# Altium PCB lined.PcbDoc (part 1 of 2)
Units mm, origin at the board's own origin, x right, y up, seen from the top; angles counter-clockwise.
Board outline 88.9 x 108.89 mm, 2 copper layers (Top Layer, Bottom Layer); 109 components, 117 nets, 494 pads, 325 vias.
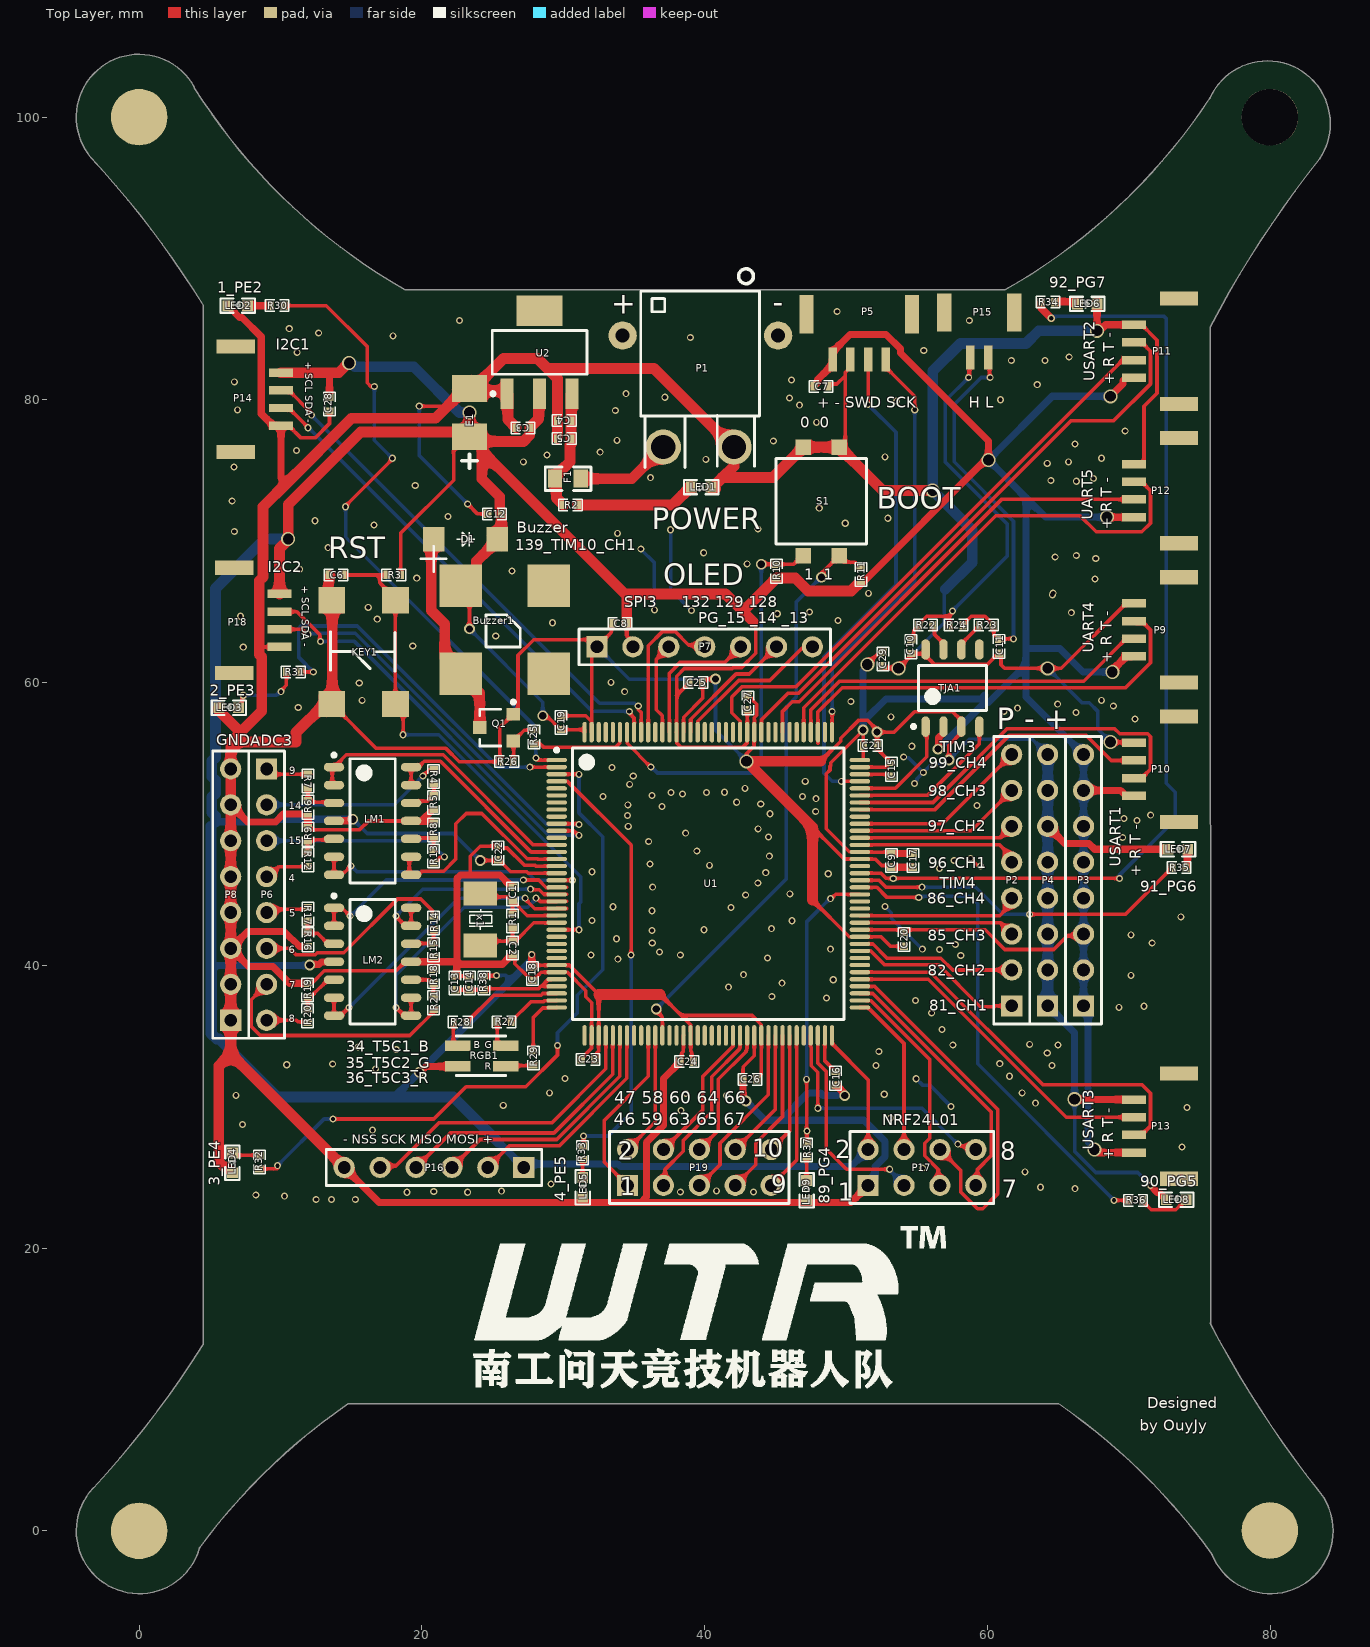
[diagram p0: Top Layer view]
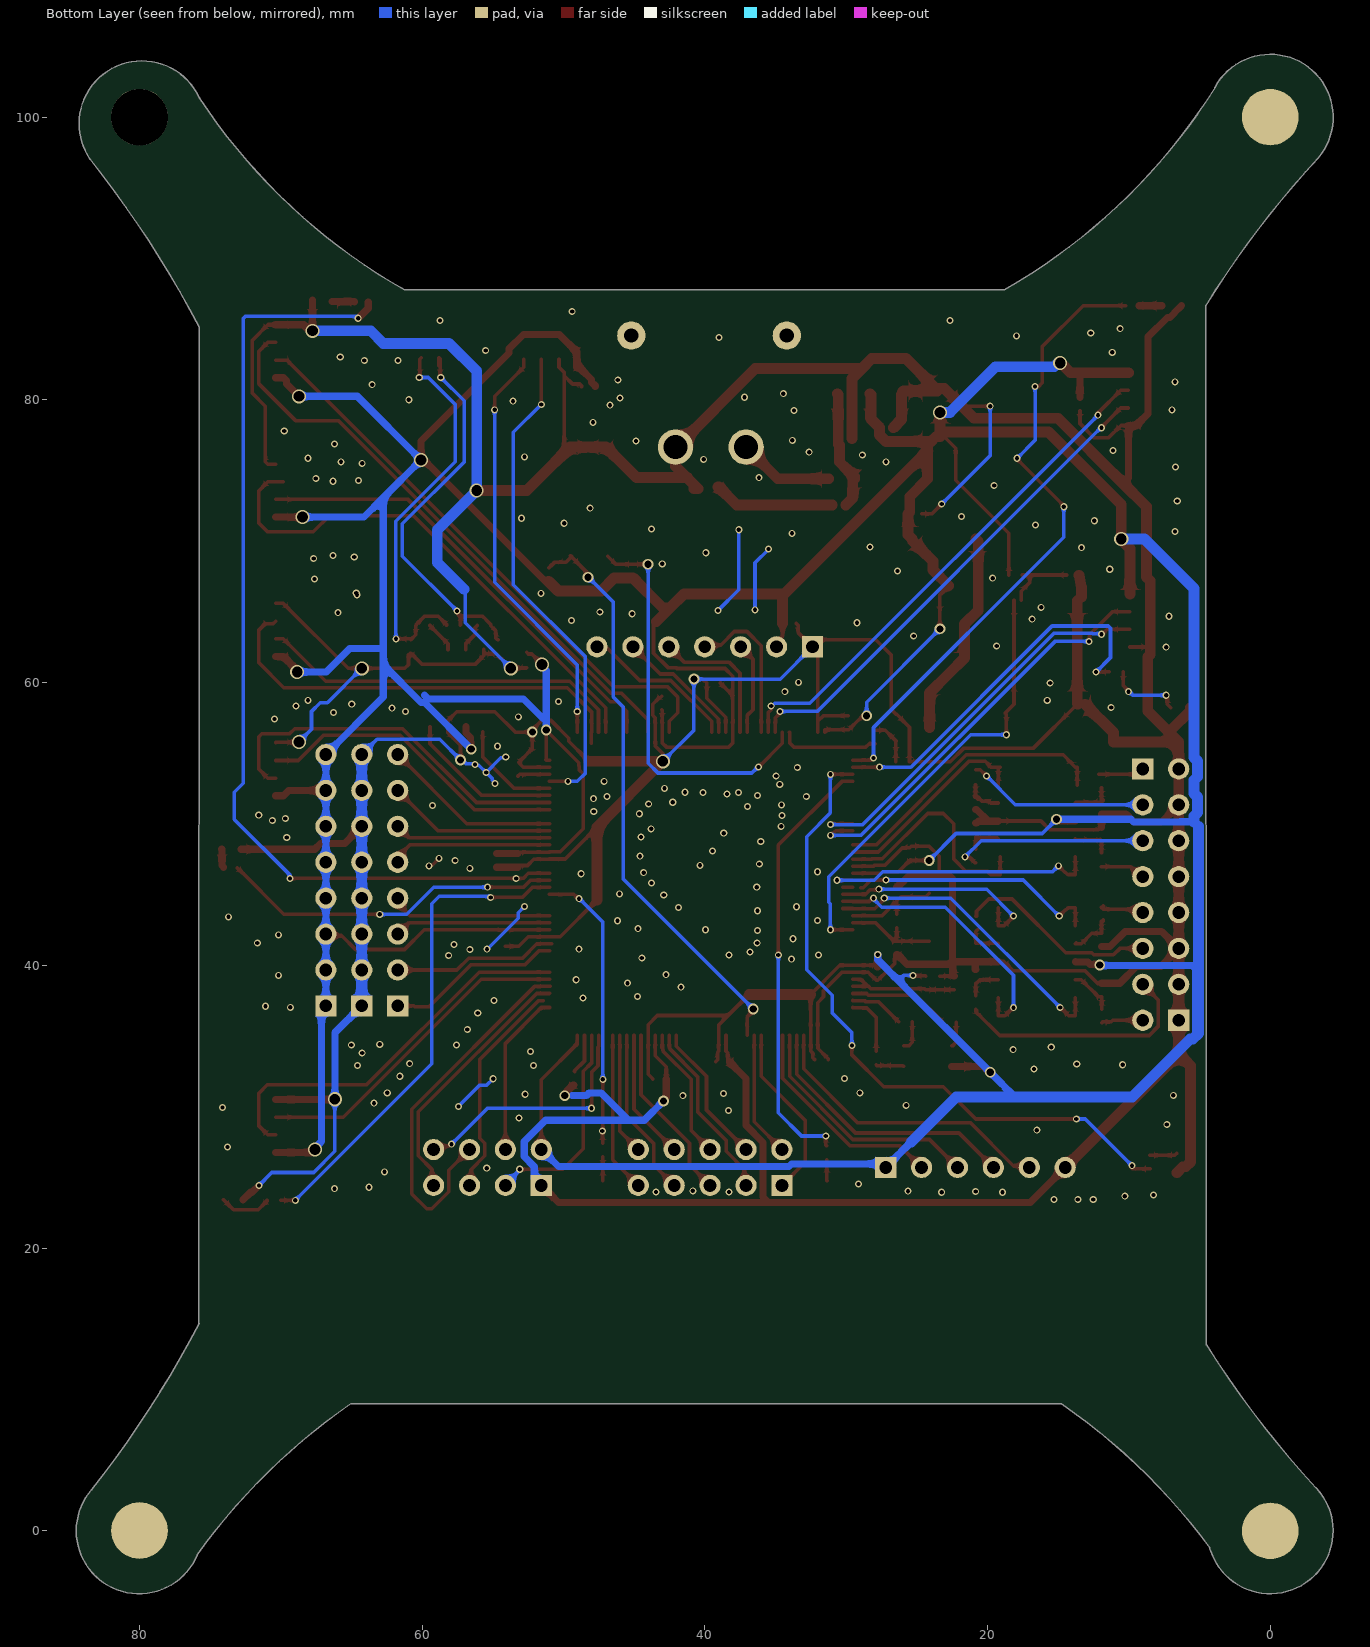
[diagram p1: Bottom Layer view, seen from below]

## Layer stack, top to bottom
Top Solder: solder mask 0.0102, Solder Resist, Dk 3.5
Top Layer: signal copper 0.0356
Dielectric 1: dielectric 0.32, FR-4, Dk 4.8
Bottom Layer: signal copper 0.0356
Bottom Solder: solder mask 0.0102, Solder Resist, Dk 3.5

## Board outline
4.265,-1.259 ccw(c4.143,-1.223) 4.271,-1.223 ccw(c4.143,-1.223) 4.268,-1.2 cw(c39.883,-27.422) 14.767,8.981 ccw(c14.694,9.086) 14.782,8.994 ccw(c14.808,9.119) 14.808,8.991 64.955,8.991 ccw(c64.955,9.119) 65.017,9.007 cw(c39.726,-27.635) 75.874,-1.643 ccw(c75.977,-1.568) 75.89,-1.661 ccw(c76.017,-1.647) 75.899,-1.696 ccw(c80.01,0) 84.457,0 ccw(c80.01,0) 83.369,2.915 ccw(c83.273,2.831) 83.364,2.92 ccw(c83.261,2.845) 83.361,2.924 cw(c143.122,49.915) 75.761,14.672 ccw(c75.667,14.757) 75.794,14.757 ccw(c75.667,14.757) 75.794,14.757 75.752,85.154 cw(c142.998,49.823) 83.487,97.031 ccw(c83.387,97.111) 83.507,97.068 ccw(c83.414,97.155) 83.52,97.085 ccw(c79.81,99.537) 84.257,99.537 ccw(c79.81,99.537) 75.749,101.351 ccw(c75.819,101.244) 75.713,101.315 cw(c40.256,124.726) 61.24,87.781 ccw(c61.216,87.655) 61.216,87.783 18.818,87.783 ccw(c18.741,87.681) 18.805,87.792 cw(c39.911,124.722) 3.909,102.068 ccw(c3.783,102.085) 3.91,102.085 ccw(c3.783,102.085) 3.895,102.147 ccw(c0,100) -3.388,97.119 ccw(c-3.277,97.18) -3.37,97.094 cw(c-54.077,50.294) 4.551,86.684 4.521,13.208 ccw(c4.648,13.208) 4.525,13.174 ccw(c4.601,13.072) 4.493,13.14 cw(c-54.077,49.936) -3.23,3.043 ccw(c-3.177,2.927) -3.271,3.013 ccw(c0,0)

## Design rules (kind name [scope] priority, off if disabled: settings)
Clearance [All] p1: gap=0.203 ignorepadtopadclearanceinfootprint=TRUE except(0: Arc-Hole Track-Hole SMDPad-Hole THPad-Hole Via-Hole Fill-Hole Poly-Hole Region-Hole Text-Hole)
ComponentClearance [All] p1: gap=0 collisioncheckmode=3 verticalgap=0 showdistances=FALSE
MinimumSolderMaskSliver [All] p1: minsoldermaskwidth=0
PolygonConnect [All] p1: connectstyle=Direct reliefconductorwidth=0.254 reliefentries=4 polygonreliefangle="90 Angle" airgapwidth=0.254
RoutingVias [All] p1: holewidth=0.3 width=0.5 viastyle="Through Hole" minholewidth=0.3 minwidth=0.5 maxholewidth=0.3 maxwidth=0.5
SilkToSilkClearance [All] p1: silktosilkclearance=0
SilkToSolderMaskClearance [IsPad] p1: minsilkscreentomaskgap=0 clearancetoexposedcopper=TRUE
SolderMaskExpansion [All] p1: expansion=0.102
Width [All] p1: maxlimit=1.27 minlimit=0.203 preferedwidth=0.203
26 further rules are at their usual default settings.

## Components (designator, comment, footprint, x,y, rotation, side; value= is the part's Value field where it differs from the comment)
Buzzer1 "Buzzer" BUZZER 30.107,67.996 r180 top
C1 "22PF" 0402 26.416,45.047 r90 top
C2 "22PF" 0402 26.416,41.237 r270 top
C3 "0.1uf" 0402 27.153,78.029 r180 top
C4 "0.1uf" 0402 30.074,78.537 r180 top
C5 "10uf" 0402 30.074,77.267 r180 top
C6 "1uf" 0402 13.919,67.615 r180 top
C7 "0.1uf" 0402 48.235,80.95 r180 top
C8 "0.1uf" 0402 34.011,64.186 r0 top
C9 "0.1uf" 0402 53.213,47.422 r270 top
C10 "30pf" 0402 54.61,62.545 r90 top
C11 "30pf" 0402 60.833,62.565 r90 top
C12 "10uf" 0402 25.146,71.934 r0 top
C13 "10uf" 0402 22.352,38.76 r270 top
C14 "104" 0402 23.368,38.76 r270 top
C15 "225" 0402 53.213,53.873 r270 top
C16 "225" 0402 49.27,32.011 r90 top
C17 "106" 0402 54.737,47.422 r90 top
C18 "104" 0402 27.813,39.421 r90 top
C19 "104" 0402 29.845,57.175 r270 top
C20 "104" 0402 54.102,41.834 r90 top
C21 "104" 0402 51.714,55.55 r180 top
C22 "104" 0402 25.4,47.953 r270 top
C23 "104" 0402 31.75,33.343 r0 top
C24 "104" 0402 38.735,33.198 r0 top
C25 "104" 0402 39.37,60.001 r180 top
C26 "104" 0402 43.205,31.943 r0 top
C27 "104" 0402 43.053,58.563 r270 top
C28 "104" 0402 13.462,79.705 r90 top
C29 "104" 0402 52.601,61.671 r90 top
D1 "DIODE" DIODE 25.328,70.155 r180 top
E1 "100uF/10V" 3528 23.368,77.394 r90 top
F1 "Fuse" 0805 30.324,74.426 r0 top
KEY1 "Key" 6*6*5轻触开关 15.875,62.154 r90 top
LED1 "green" 0603 39.751,73.838 r0 top
LED2 "red" 0603 6.985,86.665 r180 top
LED3 "red" 0603 6.35,58.217 r180 top
LED4 "red" 0603 6.604,26.035 r270 top
LED5 "red" 0603 31.386,24.308 r270 top
LED6 "green" 0603 67.056,86.792 r0 top
LED7 "green" 0603 73.482,48.211 r180 top
LED8 "green" 0603 73.355,23.419 r180 top
LED9 "green" 0603 47.212,24.091 r270 top
LM1 "LM324" LM324 16.51,50.216 r0 top
LM2 "LM324" LM324 16.51,40.254 r0 top
P1 "Header 2" XT30-PW-M 39.573,81.661 r0 top locked
P2 "Header 8" HDR1X8 61.722,37.135 r90 top
P3 "Header 8" HDR1X8 66.802,37.135 r90 top
P4 "Header 8" HDR1X8 64.262,37.135 r90 top
P5 "Header 4" GH1.25_4P 50.937,84.88 r180 top
P6 "Header 8" HDR1X8 9.017,53.899 r270 top
P7 "Header 7" HDR1X7 32.385,62.535 r0 top
P8 "Header 8" HDR1X8 6.477,36.119 r90 top
P9 "Header 4" GH1.25_4P 72.383,63.726 r90 top
P10 "Header 4" GH1.25_4P 72.383,53.869 r90 top
P11 "Header 4" GH1.25_4P 72.383,83.44 r90 top
P12 "Header 4" GH1.25_4P 72.383,73.583 r90 top
P13 "Header 4" GH1.25_4P 72.383,28.636 r90 top
P14 "Header 4" GH1.25_4P 8.008,80.051 r270 top
P15 "Header 2" GH1.25_2P 61.901,89.027 r180 top
P16 "Header 6" HDR1X6 27.203,25.705 r180 top
P17 "Header 4X2" HDR2X4 51.562,24.435 r0 top
P18 "Header 4" GH1.25_4P 7.906,64.398 r270 top
P19 "Header 5X2" HDR2X5 34.544,24.435 r0 top
Q1 "S8050" SOT-23R 25.4,56.82 r90 top
R1 "1M" 0402 26.419,43.142 r90 top
R2 "560R" 0402 30.505,72.568 r0 top
R3 "10K" 0402 18.009,67.615 r0 top
R4 "100K" 0402 20.828,53.365 r270 top
R5 "100K" 0402 20.828,51.513 r90 top
R6 "100K" 0402 11.937,51.181 r90 top
R7 "100K" 0402 11.937,53.035 r90 top
R8 "100K" 0402 20.828,49.578 r270 top
R9 "100K" 0402 11.937,49.276 r270 top
R10 "10K" 0402 45.08,67.885 r270 top
R11 "10K" 0402 51.049,67.657 r90 top
R12 "100K" 0402 11.937,47.47 r270 top
R13 "100K" 0402 20.828,47.728 r270 top
R14 "100K" 0402 20.828,43.002 r270 top
R15 "100K" 0402 20.828,41.101 r90 top
R16 "100K" 0402 11.937,41.808 r90 top
R17 "100K" 0402 11.937,43.617 r90 top
R18 "100K" 0402 20.828,39.222 r270 top
R19 "100K" 0402 11.919,38.256 r270 top
R20 "100K" 0402 11.919,36.432 r270 top
R21 "100K" 0402 20.828,37.363 r270 top
R22 "0R" 0402 55.626,64.064 r180 top
R23 "0R" 0402 59.919,64.064 r0 top
R24 "120R" 0402 57.785,64.064 r180 top
R25 "510R" 0402 27.94,56.159 r90 top
R26 "10K" 0402 26.002,54.407 r0 top
R27 "47R" 0402 25.811,36.006 r180 top
R28 "47R" 0402 22.708,35.992 r0 top
R29 "68R" 0402 27.879,33.452 r270 top
R30 "1K" 0402 9.754,86.665 r0 top
R31 "1K" 0402 10.897,60.757 r0 top
R32 "1K" 0402 8.509,26.086 r270 top
R33 "1K" 0402 31.369,26.746 r90 top
R34 "510R" 0402 64.287,86.919 r180 top
R35 "510R" 0402 73.558,46.914 r180 top
R36 "510R" 0402 70.485,23.381 r180 top
R37 "510R" 0402 47.21,26.94 r90 top
R38 "10R" 0402 24.384,38.76 r270 top
RGB1 "RGB" RGB_LED 24.235,33.579 r0 top
S1 "Switch" SWITCH_2P 48.255,72.825 r0 top
TJA1 "TJA1050" TJA1050 57.531,59.619 r90 top
U1 "STM32F407ZGT6" STM32F103ZETx 40.259,45.771 r0 top
U2 "AMS1117-3.3" ASM1117 28.321,83.363 r90 top
x1 "8MHz" 8M晶振 24.13,43.244 r270 top

## Footprints (in the part's own frame and the unit in brackets; to place one, negate y for a bottom-side part, rotate by r counter-clockwise, add the part's x,y. Pads: shape width x height; smd on the part's side, far side on the other; paste and mask are expansions set on the pad)
6*6*5轻触开关 [mm]
  rect 1.85x1.9 smd: 1(-3.675,2.25) 2(3.675,2.25) 3(-3.675,-2.25) 4(3.675,-2.25)
  silkscreen extent -1.35,-2.22 1.45,2.35
8M晶振 [mm]
  rect 1.7x2.4 smd: 1(-1.85,0) 2(1.85,0)
  silkscreen extent -0.72,-0.77 0.72,0.87, body extent -2.5,-1.6 2.5,1.6, height 0.25
0402 [mil]
  rect 20x23.62 smd: 1(-19,0) 2(19,0)
  silkscreen extent -33,-16 33,16
0603 [mil]
  rect 30x30 smd: 1(-27,0) 2(27.5,-0.06)
  silkscreen extent -48,-20 48,20
0805 [mm]
  rect 1x1.27 smd: 1(-0.914,0) 2(0.914,0)
  silkscreen extent -1.6,-0.84 1.63,0.84
3528 [mm]
  rect 1.9x2.5 smd: 1(0,0) 2(3.42,0)
  silkscreen extent -2.24,-0.56 -1.24,0.56
ASM1117 [mm] "SOT223, 4-Leads, Body 6.51x7.00mm (avg), Pitch 2.30mm, IPC Medium Density"
  rect 2.15x0.9 smd: 1(-2.93,2.3) 2(-2.93,0) 3(-2.93,-2.3)
  rect 2.15x3.25 smd: 4(2.93,0)
  silkscreen extent -3.05,-3.35 1.55,3.42, body extent -1.86,-3.35 1.86,3.35, height 1.8
BUZZER [mm]
  rect 3x3 smd: 1(7.366,1.143) 2(7.366,7.366) 3(1.143,7.366) 4(1.143,1.143)
  silkscreen extent 3.15,-1.65 10.16,5.48
DIODE [mm] "SODFL, 2-Leads, Body 3.63x5.35mm, IPC Medium Density"
  rect 1.52x1.724 smd: 1(0,0) 2(4.5,0)
  silkscreen extent 1.57,-0.5 2.86,0.52
GH1.25_2P [mm]
  rect 1x2.7 smd: 0(0,2.845) 0(4.95,2.845)
  rect 0.6x1.7 smd: 1(1.85,6.045) 2(3.1,6.045)
GH1.25_4P [mm]
  rect 1x2.7 smd: 0(-3.725,-1.175) 0(3.725,-1.175)
  rect 0.6x1.7 smd: 1(-1.875,2.025) 2(-0.625,2.025) 3(0.625,2.025) 4(1.875,2.025)
HDR1X6 [mm] "Connector; Header; 6 Position"
  rect 1.5x1.5 hole 0.9: 1(0,0)
  round 1.5 hole 0.9: 2(2.54,0) 3(5.08,0) 4(7.62,0) 5(10.16,0) 6(12.7,0)
  silkscreen extent -1.27,-1.27 13.97,1.27
HDR1X7 [mm] "Connector; Header; 7 Position"
  rect 1.5x1.5 hole 0.9: 1(0,0)
  round 1.5 hole 0.9: 2(2.54,0) 3(5.08,0) 4(7.62,0) 5(10.16,0) 6(12.7,0) 7(15.24,0)
  silkscreen extent -1.27,-1.27 16.51,1.27
HDR1X8 [mm] "Connector; Header; 8 Position"
  rect 1.5x1.5 hole 0.9: 1(0,0)
  round 1.5 hole 0.9: 2(2.54,0) 3(5.08,0) 4(7.62,0) 5(10.16,0) 6(12.7,0) 7(15.24,0) 8(17.78,0)
  silkscreen extent -1.27,-1.27 19.05,1.27
HDR2X4 [mm] "Connector; Header; 4x2 Position"
  rect 1.5x1.5 hole 0.9: 1(0,0)
  round 1.5 hole 0.9: 2(0,2.54) 3(2.54,0) 4(2.54,2.54) 5(5.08,0) 6(5.08,2.54) 7(7.62,0) 8(7.62,2.54)
  silkscreen extent -1.27,-1.27 8.89,3.81
HDR2X5 [mm] "Connector; Header; 5x2 Position"
  rect 1.5x1.5 hole 0.9: 1(0,0)
  round 1.5 hole 0.9: 2(0,2.54) 3(2.54,0) 4(2.54,2.54) 5(5.08,0) 6(5.08,2.54) 7(7.62,0) 8(7.62,2.54) 9(10.16,0) 10(10.16,2.54)
  silkscreen extent -1.27,-1.27 11.43,3.81
LM324 [mm] "SOIC, 14-Leads, Body 8.65x3.90mm, Pitch 1.27mm, IPC Medium Density"
  oval 1.45x0.6 smd: 1(-2.725,3.81) 2(-2.725,2.54) 3(-2.725,1.27) 4(-2.725,0) 5(-2.725,-1.27) 6(-2.725,-2.54) 7(-2.725,-3.81) 8(2.725,-3.81) 9(2.725,-2.54) 10(2.725,-1.27) 11(2.725,0) 12(2.725,1.27) 13(2.725,2.54) 14(2.725,3.81)
  silkscreen extent -2.85,-4.4 1.6,4.78, body extent -2,-4.4 2,4.4, height 1.75
RGB_LED [mm]
  rect 1.8x0.75 smd: 1(-1.7,-0.725) 2(-1.7,0.725) 3(1.7,-0.725) 4(1.7,0.725)
  silkscreen extent -1.8,-1.36 1.7,1.44
SOT-23R [mm] "SOT-23; 3 Leads; Body 3.0 x 2.5 mm, inc. leads (LxW max)"
  rect 0.9x0.95 smd: 1(0.95,-1.048) 2(-0.95,-1.048) 3(0,1.302)
  silkscreen extent -1.3,-1.19 1.93,1.3
STM32F103ZETx [mm] "TSQFP, 144-Leads, Body 20.00x20.00mm, Pitch 0.50mm, IPC Medium Density"
  oval 1.45x0.3 smd: 1(-10.725,8.75) 2(-10.725,8.25) 3(-10.725,7.75) 4(-10.725,7.25) 5(-10.725,6.75) 6(-10.725,6.25) 7(-10.725,5.75) 8(-10.725,5.25) 9(-10.725,4.75) 10(-10.725,4.25) 11(-10.725,3.75) 12(-10.725,3.25) 13(-10.725,2.75) 14(-10.725,2.25) 15(-10.725,1.75) 16(-10.725,1.25) 17(-10.725,0.75) 18(-10.725,0.25) 19(-10.725,-0.25) 20(-10.725,-0.75) 21(-10.725,-1.25) 22(-10.725,-1.75) 23(-10.725,-2.25) 24(-10.725,-2.75) 25(-10.725,-3.25) 26(-10.725,-3.75) 27(-10.725,-4.25) 28(-10.725,-4.75) 29(-10.725,-5.25) 30(-10.725,-5.75) 31(-10.725,-6.25) 32(-10.725,-6.75) 33(-10.725,-7.25) 34(-10.725,-7.75) 35(-10.725,-8.25) 36(-10.725,-8.75) 73(10.725,-8.75) 74(10.725,-8.25) 75(10.725,-7.75) 76(10.725,-7.25) 77(10.725,-6.75) 78(10.725,-6.25) 79(10.725,-5.75) 80(10.725,-5.25) 81(10.725,-4.75) 82(10.725,-4.25) 83(10.725,-3.75) 84(10.725,-3.25) 85(10.725,-2.75) 86(10.725,-2.25) 87(10.725,-1.75) 88(10.725,-1.25) 89(10.725,-0.75) 90(10.725,-0.25) 91(10.725,0.25) 92(10.725,0.75) 93(10.725,1.25) 94(10.725,1.75) 95(10.725,2.25) 96(10.725,2.75) 97(10.725,3.25) 98(10.725,3.75) 99(10.725,4.25) 100(10.725,4.75) 101(10.725,5.25) 102(10.725,5.75) 103(10.725,6.25) 104(10.725,6.75) 105(10.725,7.25) 106(10.725,7.75) 107(10.725,8.25) 108(10.725,8.75)
  oval 0.3x1.45 smd: 37(-8.75,-10.725) 38(-8.25,-10.725) 39(-7.75,-10.725) 40(-7.25,-10.725) 41(-6.75,-10.725) 42(-6.25,-10.725) 43(-5.75,-10.725) 44(-5.25,-10.725) 45(-4.75,-10.725) 46(-4.25,-10.725) 47(-3.75,-10.725) 48(-3.25,-10.725) 49(-2.75,-10.725) 50(-2.25,-10.725) 51(-1.75,-10.725) 52(-1.25,-10.725) 53(-0.75,-10.725) 54(-0.25,-10.725) 55(0.25,-10.725) 56(0.75,-10.725) 57(1.25,-10.725) 58(1.75,-10.725) 59(2.25,-10.725) 60(2.75,-10.725) 61(3.25,-10.725) 62(3.75,-10.725) 63(4.25,-10.725) 64(4.75,-10.725) 65(5.25,-10.725) 66(5.75,-10.725) 67(6.25,-10.725) 68(6.75,-10.725) 69(7.25,-10.725) 70(7.75,-10.725) 71(8.25,-10.725) 72(8.75,-10.725) 109(8.75,10.725) 110(8.25,10.725) 111(7.75,10.725) 112(7.25,10.725) 113(6.75,10.725) 114(6.25,10.725) 115(5.75,10.725) 116(5.25,10.725) 117(4.75,10.725) 118(4.25,10.725) 119(3.75,10.725) 120(3.25,10.725) 121(2.75,10.725) 122(2.25,10.725) 123(1.75,10.725) 124(1.25,10.725) 125(0.75,10.725) 126(0.25,10.725) 127(-0.25,10.725) 128(-0.75,10.725) 129(-1.25,10.725) 130(-1.75,10.725) 131(-2.25,10.725) 132(-2.75,10.725) 133(-3.25,10.725) 134(-3.75,10.725) 135(-4.25,10.725) 136(-4.75,10.725) 137(-5.25,10.725) 138(-5.75,10.725) 139(-6.25,10.725) 140(-6.75,10.725) 141(-7.25,10.725) 142(-7.75,10.725) 143(-8.25,10.725) 144(-8.75,10.725)
  silkscreen extent -10.85,-9.6 9.6,9.6, body extent -10,-10 10,10, height 1.6
SWITCH_2P [mm]
  rect 1.1x1.1 smd: 1(-1.27,3.835) 2(-1.27,-3.835) 3(1.27,3.835) 4(1.27,-3.835)
  silkscreen extent -3.2,-3.03 3.2,3.03
TJA1050 [mm] "SOIC, 8-Leads, Body 4.90x3.90mm, Pitch 1.27mm, IPC Medium Density"
  oval 1.45x0.6 smd: 1(-2.725,1.905) 2(-2.725,0.635) 3(-2.725,-0.635) 4(-2.725,-1.905) 5(2.725,-1.905) 6(2.725,-0.635) 7(2.725,0.635) 8(2.725,1.905)
  silkscreen extent -2.85,-2.4 1.6,2.88, body extent -2,-2.4 2,2.4, height 1.75
XT30-PW-M [mm]
  round 2 hole 1: 0(-5.375,2.892) 0(5.625,2.892)
  round 2.5 hole 1.7: 1(-2.5,-5) 2(2.5,-5)
  silkscreen extent -4.09,-6.45 4.32,7.61

## Part data
C1 C2 C3 C4 C5 C6 C7 C8 C9 C10 C11 C12 C13 C14 C15 C16 C17 C18 C19 C20 C21 C22 C23 C24 C25 C26 C27 C28 C29: library part C
E1: library part C-CM, "钽电容"
LED1 LED2 LED3 LED4 LED5 LED6 LED7 LED8 LED9: library part LED
P1 P15: "Header, 2-Pin", LatestRevisionDate=17-Jul-2002, LatestRevisionNote="Re-released for DXP Platform.", Publisher="Altium Limited"
P2 P3 P4 P6 P8: "Header, 8-Pin", LatestRevisionDate=17-Jul-2002, LatestRevisionNote="Re-released for DXP Platform.", Publisher="Altium Limited"
P5 P9 P10 P11 P12 P13 P14 P18: "Header, 4-Pin", LatestRevisionDate=17-Jul-2002, LatestRevisionNote="Re-released for DXP Platform.", Publisher="Altium Limited"
P7: "Header, 7-Pin", LatestRevisionDate=17-Jul-2002, LatestRevisionNote="Re-released for DXP Platform.", Publisher="Altium Limited"
P16: "Header, 6-Pin", LatestRevisionDate=17-Jul-2002, LatestRevisionNote="Re-released for DXP Platform.", Publisher="Altium Limited"
P17: "Header, 4-Pin, Dual row", LatestRevisionDate=17-Jul-2002, LatestRevisionNote="Re-released for DXP Platform.", Publisher="Altium Limited"
P19: "Header, 5-Pin, Dual row", LatestRevisionDate=17-Jul-2002, LatestRevisionNote="Re-released for DXP Platform.", Publisher="Altium Limited"
Q1: library part NPN, "8050/BCW846/BCW847"
R1 R2 R3 R4 R5 R6 R7 R8 R9 R10 R11 R12 R13 R14 R15 R16 R17 R18 R19 R20 R21 R22 R23 R24 R25 R26 R27 R28 R29 R30 R31 R32 R33 R34 R35 R36 R37 R38: library part R
x1: library part XTAL_8MHz

## Free pads (board coordinates)
  round 4 all layers, no hole: 2(0,0) 2(0,100) 2(79.985,0.025)
  round 4 hole 4: 2(79.985,100)

## Via types
v1: diameter 0.5, hole 0.3, Top Layer to Bottom Layer, tented both sides, 293 vias
v2: diameter 0.991, hole 0.762, Top Layer to Bottom Layer, tented both sides, 16 vias
v3: diameter 0.762, hole 0.508, Top Layer to Bottom Layer, tented both sides, 16 vias

## Nets (pads, with @x,y where several pads share a name; then routed paths per layer and width w, separated by ;. In a path a pad name is that pad's centre, name@x,y a point inside that pad or via, vN(x,y) a via of type N, cw(c..) or ccw(c..) an arc to the next point about the centre after c; other vN are vias at no path point)
ADC3_4: LM1.6 LM1.7 U1.18 | length 20.3
  Top Layer w0.254: LM1.6@13.785,47.676 LM1.7@13.785,46.435 ; LM1.7@14.181,46.435 LM1.7@13.785,46.435 ; v1(14.986,47.041) 14.54,46.595 14.492,46.595 14.304,46.406 LM1.7@13.785,46.406 LM1.7@13.785,46.435 ; U1.18@29.534,46.021 29.536,46.023 v1(30.656,46.023)
  Bottom Layer w0.254: v1(14.986,47.041) 15.405,46.622 27.418,46.622 28.017,46.023 v1(30.656,46.023)
ADC3_5: LM2.1 LM2.2 U1.19 | length 18.7
  Top Layer w0.254: LM2.2@13.785,42.794 LM2.1@13.785,44.064 14.304,44.064 14.437,43.931 14.48,43.931 v1(14.926,43.485) ; v1(27.178,46.042) 28.255,46.042 28.796,45.501 U1.19@28.947,45.501 ; U1.19@29.534,45.521 29.534,45.525 U1.19@30.226,45.525
  Bottom Layer w0.254: v1(14.926,43.485) 17.483,46.042 v1(27.178,46.042)
ADC3_6: LM2.13 LM2.14 U1.20 | length 15.6
  Top Layer w0.254: v1(18.161,43.485) 18.161,43.464 18.831,42.794 LM2.13@19.235,42.794 LM2.14@19.235,44.064 ; v1(27.686,45.39) 27.733,45.343 28.308,45.343 28.621,45.03 29.525,45.03 U1.20@29.534,45.021 ; U1.20@29.534,45.025 U1.20@30.226,45.025
  Bottom Layer w0.254: v1(18.161,43.485) 20.066,45.39 v1(27.686,45.39)
ADC3_7: LM2.8 LM2.9 U1.21 | length 19.3
  Top Layer w0.254: v1(18.161,37.008) 18.204,37.008 18.767,36.444 LM2.8@19.235,36.444 LM2.9@19.235,37.714 ; v1(28.067,44.755) 28.134,44.755 28.368,44.521 U1.21@29.534,44.521 U1.21@29.525,44.53 ; U1.21@29.534,44.525 U1.21@30.226,44.525
  Bottom Layer w0.254: v1(18.161,37.008) 18.161,39.294 22.987,44.12 27.491,44.12 28.067,44.696 v1(28.067,44.755)
ADC3_8: LM2.6 LM2.7 U1.22 | length 21.5
  Top Layer w0.254: LM2.6@13.785,37.714 LM2.7@13.785,36.444 14.246,36.444 14.823,37.021 v1(14.859,37.021) ; v1(27.305,44.755) 27.305,44.688 27.981,44.012 29.525,44.012 U1.22@29.534,44.021 29.534,44.025 U1.22@30.226,44.025
  Bottom Layer w0.254: v1(14.859,37.021) 22.593,44.755 v1(27.305,44.755)
ADC3_9: LM1.1 LM1.2 U1.13 | length 20.9
  Top Layer w0.254: LM1.2@13.658,52.756 13.658,54.026 LM1.1@13.785,54.026 14.649,54.889 21.51,54.889 27.879,48.521 U1.13@29.534,48.521 29.525,48.53 28.732,48.53
ADC3_14: LM1.13 LM1.14 U1.14 | length 14.6
  Top Layer w0.254: LM1.13@19.235,52.756 19.235,53.899 19.108,54.026 LM1.14@19.235,54.026 19.754,54.026 20.16,54.432 21.311,54.432 27.722,48.021 U1.14@29.534,48.021
ADC3_15: LM1.8 LM1.9 U1.15 | length 16.3
  Top Layer w0.254: LM1.9@19.108,47.676 19.108,46.406 LM1.8@19.235,46.406 19.754,46.406 20.008,46.66 21.539,46.66 22.4,47.521 22.4,50.01 23.136,50.746 24.235,50.746 27.445,47.536 28.188,47.536 28.203,47.521 U1.15@29.534,47.521
ADC_CH1: P6.1 R7.2 | length 3.3
  Top Layer w0.254: P6.1@9.017,53.899 9.398,53.518 R7.2@11.937,53.518 R7.2@12.141,53.518
ADC_CH2: P6.2 R4.1 | length 12.9
  Top Layer w0.254: v1(20.066,53.391) 20.512,53.837 20.817,53.837 R4.1@20.828,53.848 ; R4.1@20.702,53.848 R4.1@20.748,53.848
  Bottom Layer w0.254: P6.2@9.017,51.359 18.034,51.359 v1(20.066,53.391)
ADC_CH3: P6.3 R13.2 | length 14
  Top Layer w0.254: R13.2@20.828,47.246 20.874,47.246 21.257,47.629 21.543,47.629 v1(21.59,47.676)
  Bottom Layer w0.254: P6.3@9.017,48.819 20.447,48.819 v1(21.59,47.676)
ADC_CH4: P6.4 R12.2 | length 3.2
  Top Layer w0.254: P6.4@9.017,46.279 9.199,46.279 9.908,46.987 R12.2@11.937,46.987
ADC_CH5: P6.5 R17.2 | length 3.3
  Top Layer w0.254: P6.5@9.017,43.739 9.25,43.972 11.81,43.972 R17.2@11.937,44.099 R17.2@11.81,44.226 ; R17.2@11.811,44.099 R17.2@11.857,44.099
ADC_CH6: P6.6 R14.1 | length 14.3
  Top Layer w0.254: P6.6@9.017,41.199 10.635,41.199 11.093,40.742 12.466,40.742 12.618,40.894 14.471,40.894 18.271,44.694 19.921,44.694 20.782,43.833 20.782,43.485 R14.1@20.828,43.485
ADC_CH7: P6.7 R21.2 | length 17.6
  Top Layer w0.254: P6.7@9.017,38.659 7.937,37.579 7.937,35.671 8.57,35.039 19.146,35.039 20.828,36.721 R21.2@20.828,36.789 ; R21.2@20.782,36.754 20.817,36.789 R21.2@20.828,36.789 ; R21.2@20.828,36.789 20.782,36.835 R21.2@20.828,36.881 R21.2@20.828,36.789
ADC_CH8: P6.8 R20.2 | length 3
  Top Layer w0.254: P6.8@9.017,36.119 11.124,36.119 11.238,36.006 11.863,36.006 R20.2@11.919,35.95 R20.2@11.873,35.95
BOOT0: R10.1 S1.2 U1.138 | length 28.6
  Top Layer w0.254: U1.138@34.509,56.496 34.518,56.487 34.518,55.703 v1(36.195,54.026) ; v3(44.009,68.377) 46.3,68.377 S1.2@46.858,68.935
  Bottom Layer w0.254: v1(36.195,54.026) 36.249,54.026 36.668,53.607 43.31,53.607 44.005,54.301 44.005,68.373 v3(44.009,68.377)
BOOT1: R11.2 S1.4 U1.48 | length 41.5
  Top Layer w0.254: v3(36.576,36.915) 36.576,36.778 37.009,36.345 U1.48@37.009,35.046 ; v3(48.26,67.453) 48.26,67.725 S1.4@49.434,68.899 ; S1.4@49.398,68.935 S1.4@49.434,68.899 ; S1.4@49.525,68.99 S1.4@49.434,68.899 ; R11.2@51.049,68.139 51.003,68.139 50.631,68.512 49.821,68.512 S1.4@49.434,68.899
  Bottom Layer w0.254: v3(36.576,36.915) 45.771,46.11 45.771,58.279 46.482,58.99 46.482,65.71 v3@48.26,67.488
Buzzer: R25.1 U1.139 | length 7
  Top Layer w0.254: R25.1@27.94,55.677 28.368,55.677 28.604,55.441 33.708,55.441 34,55.733 34,56.487 U1.139@34.009,56.496
CAN_RX: TJA1.4 U1.103 | length 11.2
  Top Layer w0.254: U1.103@50.984,52.021 55.77,52.021 59.436,55.687 TJA1.4@59.436,56.894
CAN_TX: TJA1.1 U1.104 | length 7.4
  Top Layer w0.254: U1.104@50.984,52.521 50.993,52.53 53.495,52.53 55.718,54.753 TJA1.1@55.718,56.508
CANH: C10.2 P15.2 R22.2 R24.2 | length 27.4
  Top Layer w0.254: C10.2@54.61,63.027 54.656,63.027 54.783,63.154 54.783,63.657 55.143,64.018 R22.2@55.143,64.064 55.143,64.11 55.466,64.433 55.466,64.442 55.718,64.694 57.277,64.694 ; R24.2@57.302,64.064 57.277,64.09 57.277,64.694 ; v1(57.531,65.075) 57.531,64.948 57.277,64.694 ; v1(58.674,81.585) 58.721,81.632 58.721,82.902 P15.2@58.801,82.982 P15.2@58.801,82.432
  Bottom Layer w0.254: v1(57.531,65.075) 61.392,68.936 61.392,71.235 57.023,75.604 57.023,79.934 v1(58.674,81.585)
CANL: C11.2 P15.1 R23.2 R24.1 | length 28.1
  Top Layer w0.254: R24.1@58.268,64.064 58.268,64.11 58.852,64.694 59.827,64.694 60.02,64.501 60.02,64.491 60.401,64.11 R23.2@60.401,64.064 60.452,64.013 60.452,63.383 60.787,63.048 60.84,63.101 v1(61.849,63.101) ; P15.1@60.051,82.982 60.151,82.882 60.151,81.632 v1(60.198,81.585)
  Bottom Layer w0.254: v1(60.198,81.585) 59.563,81.585 57.658,79.68 57.658,75.616 61.849,71.425 v1(61.849,63.101)
CE: P17.3 U1.70 | length 14.9
  Top Layer w0.254: U1.70@48.009,35.046 48.009,33.091 48.589,32.511 48.589,27.027 50.038,25.578 v1(53.086,25.578)
  Bottom Layer w0.254: v1@53.054,25.546 54.102,24.498 P17.3@54.102,24.435
CS: P7.7 U1.128 | length 11.1
  Top Layer w0.254: U1.128@39.509,56.496 39.518,56.505 39.518,57.259 42.411,60.152 44.607,60.152 46.871,62.416 47.506,62.416 P7.7@47.625,62.535
CSN: P17.4 U1.73 | length 11.7
  Top Layer w0.254: U1.73@50.984,37.021 51.559,37.021 54.102,34.478 P17.4@54.102,26.975
DC: P7.6 U1.129 | length 9.1
  Top Layer w0.254: U1.129@39.009,56.496 39.018,56.505 39.018,57.405 42.222,60.609 43.16,60.609 P7.6@45.085,62.535
EXIT_0: P19.1 U1.46 | length 12.6
  Top Layer w0.254: P19.1@34.544,24.435 32.893,26.086 32.893,29.032 36.009,32.148 U1.46@36.009,35.046
EXIT_1: P19.2 U1.47 | length 8.9
  Top Layer w0.254: P19.2@34.544,26.975 36.509,28.94 U1.47@36.509,35.046
EXIT_7: P19.4 U1.58 | length 10.1
  Top Layer w0.254: P19.4@37.084,26.975 39.878,29.769 39.878,32.148 42.009,34.279 U1.58@42.009,35.046
EXIT_8: P19.3 U1.59 | length 12.9
  Top Layer w0.254: P19.3@37.084,24.435 37.203,24.553 37.203,25.566 38.481,26.844 38.481,27.61 40.509,29.638 40.509,32.132 42.466,34.089 42.466,34.139 42.509,34.182 U1.59@42.509,35.046
EXIT_9: P19.6 U1.60 | length 9.5
  Top Layer w0.254: P19.6@39.624,26.975 40.966,28.317 40.966,31.943 42.923,33.9 42.923,33.95 42.966,33.992 42.966,34.083 43.009,34.126 U1.60@43.009,35.046 U1.60@43,35.037
EXIT_10: P19.5 U1.63 | length 12.6
  Top Layer w0.254: P19.5@39.624,24.435 41.084,25.895 41.084,27.422 44.509,30.847 U1.63@44.509,35.046
EXIT_11: P19.8 U1.64 | length 9.2
  Top Layer w0.254: P19.8@42.164,26.975 45.009,29.82 U1.64@45.009,35.046
EXIT_12: P19.7 U1.65 | length 12
  Top Layer w0.254: P19.7@42.164,24.435 43.624,25.895 43.624,27.422 45.509,29.307 U1.65@45.509,35.046
EXIT_13: P19.10 U1.66 | length 8.6
  Top Layer w0.254: P19.10@44.704,26.975 46.009,28.28 U1.66@46.009,35.046
EXIT_14: P19.9 U1.67 | length 11.4
  Top Layer w0.254: P19.9@44.704,24.435 46.509,26.24 U1.67@46.509,35.046
GLED_1: R34.2 U1.92 | length 69.7
  Top Layer w0.254: U1.92@50.984,46.521 52.48,46.521 52.849,46.152 v1(53.34,46.152) v1(69.342,46.152)
  Top Layer w0.508: R34.2@63.805,86.919 63.805,86.487 v1(64.516,85.776)
  Bottom Layer w0.254: v1(64.516,85.776) 64.643,85.903 72.495,85.903 72.644,85.754 72.644,52.883 73.279,52.248 73.279,50.324 69.342,46.387 v1(69.342,46.152)
GLED_2: R35.2 U1.91 | length 24.5
  Top Layer w0.254: U1.91@50.984,46.021 52.333,46.021 52.824,45.53 v1(55.372,45.53) ; v1(62.992,43.612) 69.773,43.612 72.902,46.741 72.948,46.741 73.075,46.868 R35.2@73.075,46.914
  Bottom Layer w0.254: v1(55.372,45.53) 59.169,45.53 61.087,43.612 v1(62.992,43.612)
GLED_3: R36.2 U1.90 | length 34.9
  Top Layer w0.254: U1.90@50.984,45.521 52.187,45.521 52.902,44.806 v1(55.143,44.806) ; v1(68.961,23.381) R36.2@70.002,23.381
  Bottom Layer w0.254: v1(55.143,44.806) 55.22,44.882 58.779,44.882 59.309,44.352 59.309,33.033 v1(68.961,23.381)
GLED_4: R37.2 U1.89 | length 20.3
  Top Layer w0.254: R37.2@47.21,27.422 47.227,27.439 47.227,28.297 47.21,28.313 v1(47.21,31.943) ; v1(48.895,44.717) 48.962,44.717 49.266,45.021 U1.89@50.984,45.021
  Bottom Layer w0.254: v1(47.21,31.943) 47.21,43.07 v1@48.895,44.755
  other v1: 47.244,28.28